# Altium PCB NEW_UI.PcbDoc (part 4 of 4)
Units mm, origin at the board's own origin, x right, y up, seen from the top; angles counter-clockwise.
Board outline 100 x 100 mm, 4 copper layers (SIG/PWR1, GND1, GNS2, SIG/PWR2), stack 1.17 mm thick; 240 components, 215 nets, 917 pads, 445 vias.
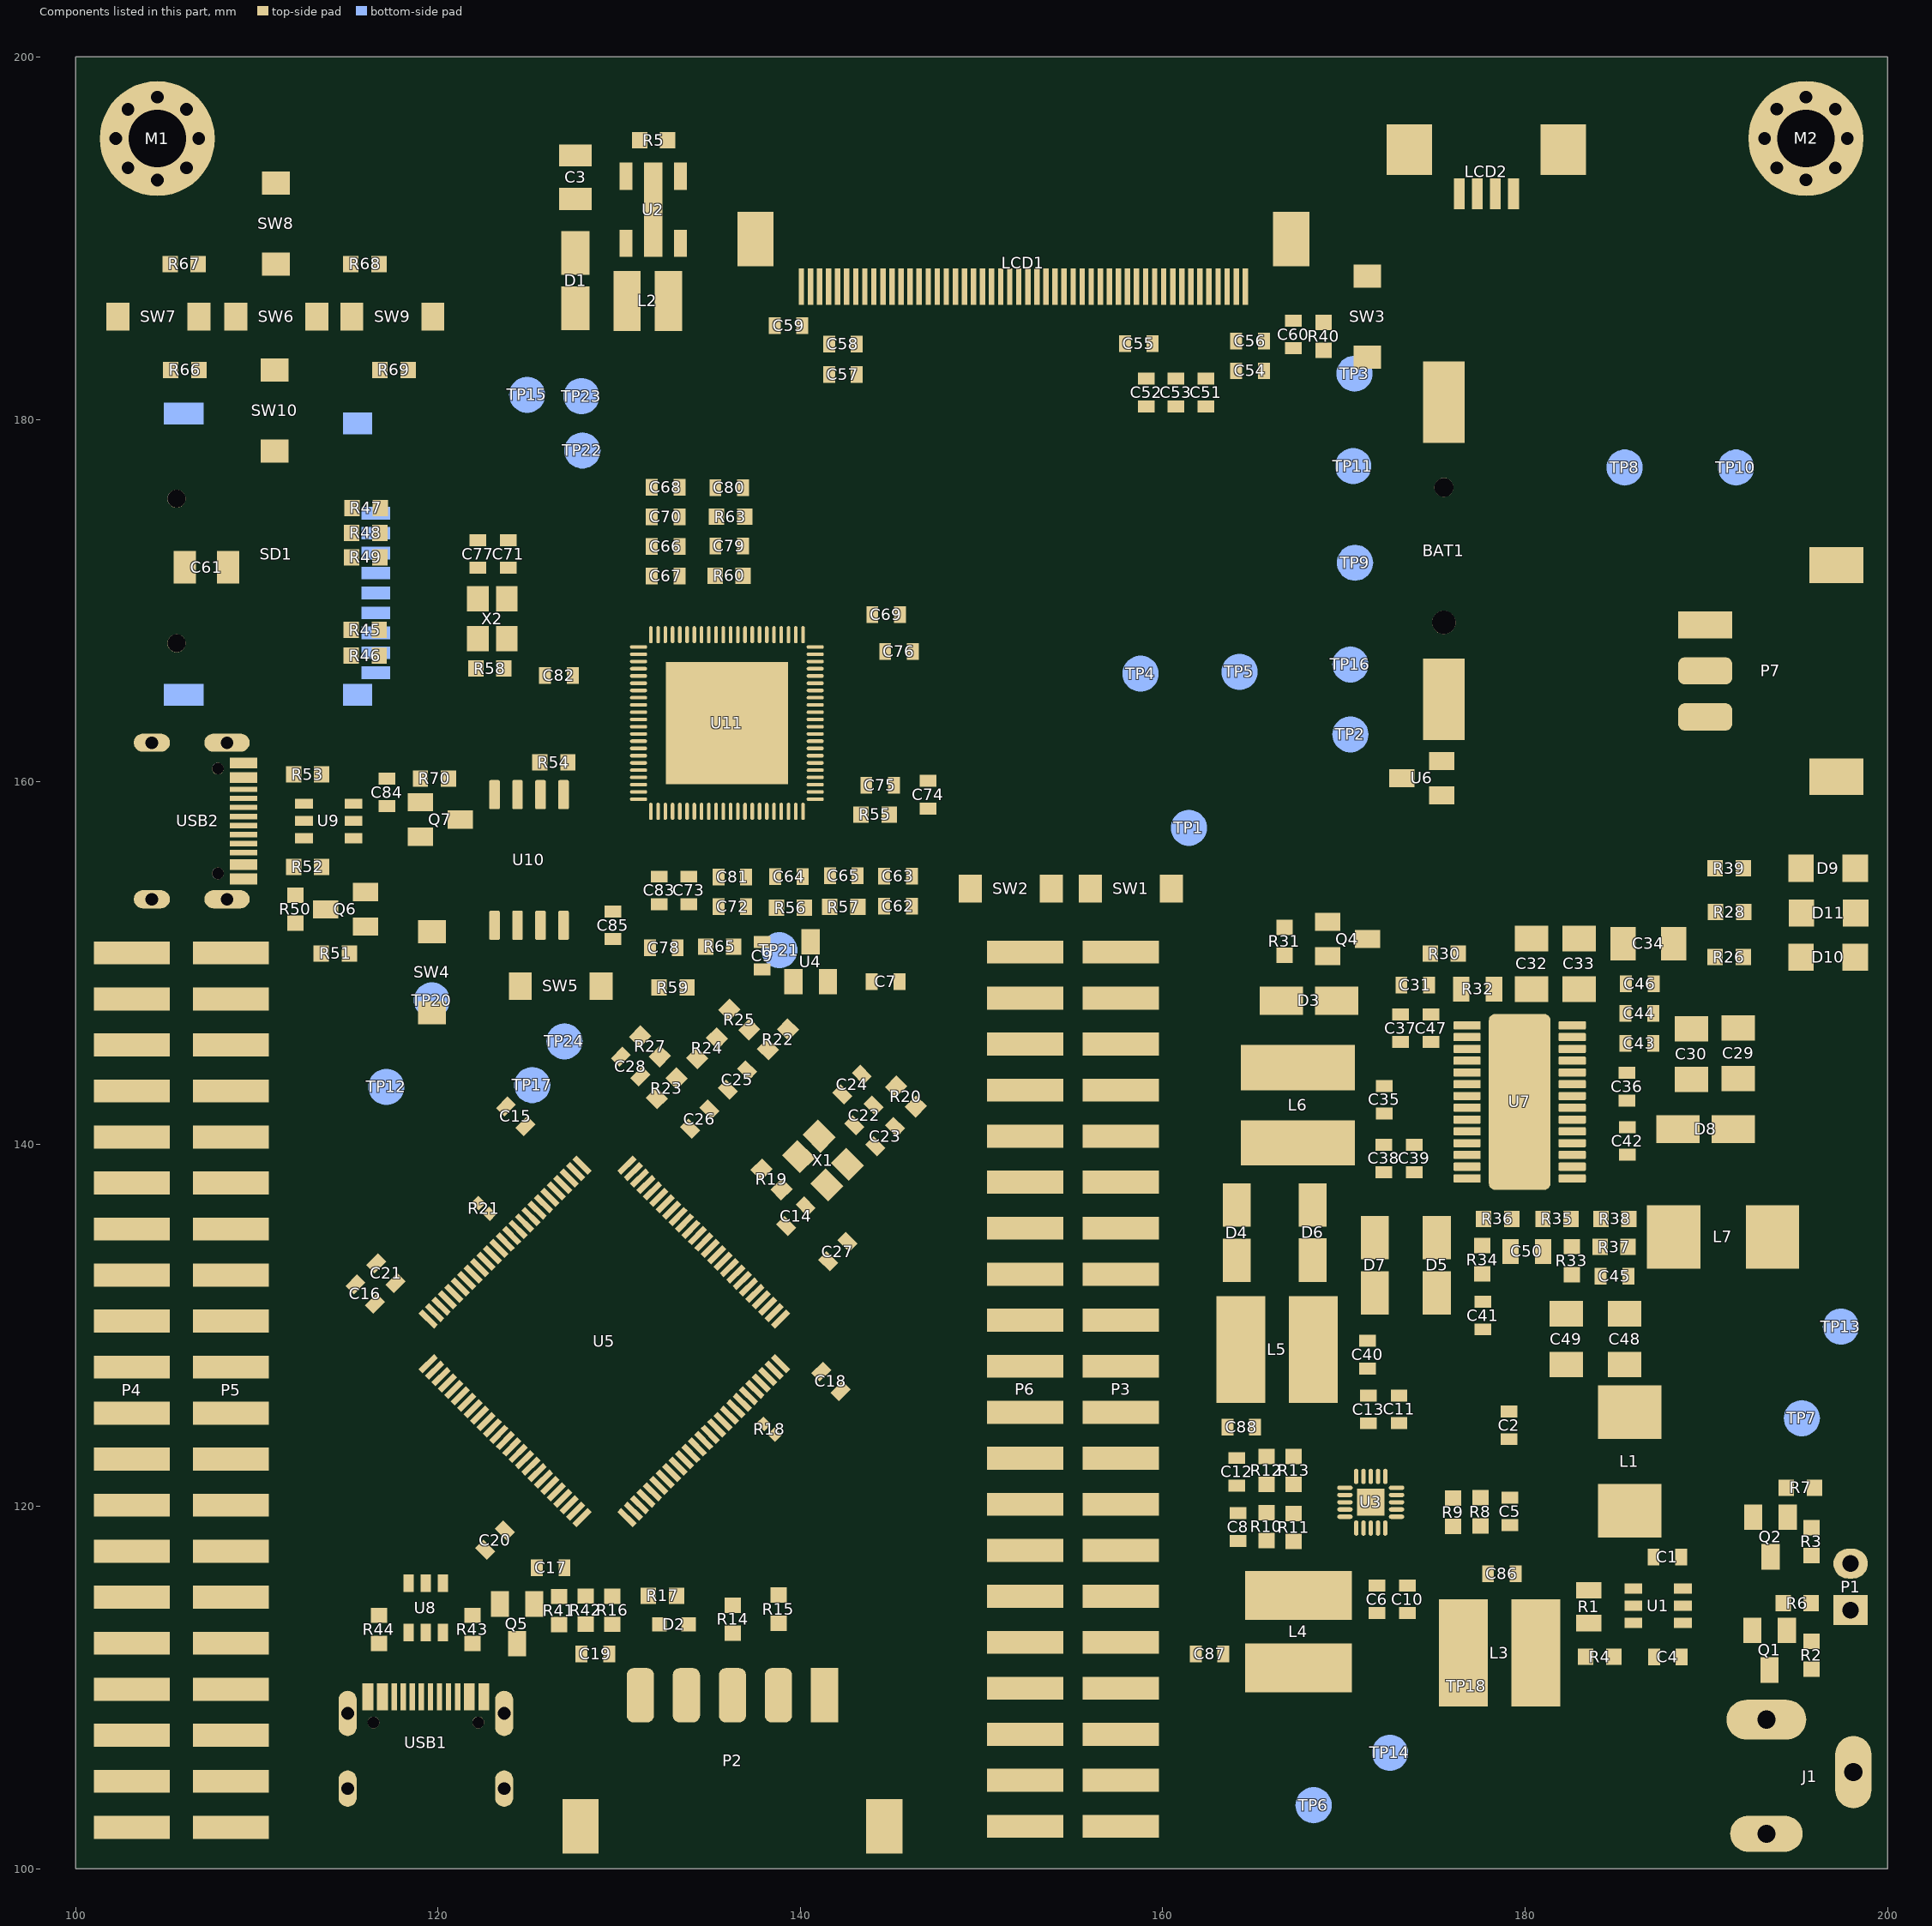
[diagram p6: the components of this part, seen from the top]

## Polygon pours and split planes (outlines as drawn) (continued)
3V3 on SIG/PWR2 "3V3_L04_P048" (solid, remove dead copper, pour order 48): 129.616,144.577 143.573,130.619 128.41,115.456 114.452,129.413
5V on SIG/PWR2 "5V_L04_P012" (solid, remove dead copper, pour order 12): 173.965,125.374 169.113,125.374 169.113,115.164 173.965,115.164
1.1V on SIG/PWR2 "1.1V_L04_P095" (solid, remove dead copper, pour order 95): 132.207,156.108 132.207,155.702 132.512,155.499 136.703,154 159.918,154 159.918,155.409 136.728,155.409 132.486,156.337
3V3 on SIG/PWR2 "3V3_L04_P107" (solid, remove dead copper, pour order 107): 152.476,158.852 148.488,158.852 147.65,159.69 134.925,159.69 134.925,164.338 138.43,164.338 138.43,163.881 140.691,163.881 143.104,161.468 152.476,161.468
5V on SIG/PWR2 "5V_L04_P123" (solid, pour order 123): 115.291,155.118 115.291,148.793 108.026,141.529 108.026,117.805 110.896,114.935 112.725,116.764 112.725,126.009 111.938,126.797 111.938,139.243 116.764,144.069 116.764,153.06 117.272,153.568 117.551,153.568 117.551,153.899 117.526,153.924 117.526,154.356 116.764,155.118
3V3 on SIG/PWR2 "3V3_L04_P111" (solid, remove dead copper, pour order 111): 124.333,160.299 124.333,158.953 130.251,153.035 130.251,149.784 132.664,147.371 132.664,144.602 132.131,144.602 125.324,151.409 125.324,155.397 120.599,160.122 120.599,161.392 123.241,161.392
3V3 on SIG/PWR2 "3V3_L04_P116" (solid, remove dead copper, pour order 116): 114.046,167.005 113.411,166.37 113.411,164.211 115.367,162.255 121.082,162.255 123.444,159.893 123.444,157.785 116.713,157.785 107.848,166.649 107.848,167.005
3V3 on SIG/PWR2 "3V3_L04_P118" (solid, pour order 118): 133.325,157.709 133.35,157.683 133.35,146.482 133.223,146.482 125.908,153.797 125.908,156.007 129.184,156.007 130.886,157.709 133.35,157.709
3V3 on SIG/PWR2 "3V3_L04_P106" (solid, remove dead copper, pour order 106): 143.866,167.31 143.002,167.31 141.453,165.76 134.976,165.76 134.976,163.957 141.3,163.957 143.866,166.522
5V on SIG/PWR2 "5V_L04_P065" (solid, remove dead copper, pour order 65): 113.106,104.369 110.896,104.369 110.896,114.935 112.725,116.764 124.054,116.764 124.054,115.113 124.079,115.087 118.085,115.087 114.173,115.087 113.106,114.021
NetJ1_3 on SIG/PWR2 "NETJ1_3_L04_P117" (solid, remove dead copper, pour order 117): 199.365,115.503 195.809,115.503 195.809,102.819 199.365,102.819
1.1V on SIG/PWR2 "1.1V_L04_P054" (solid, remove dead copper, pour order 54): 163.271,125.07 162.306,125.07 160.757,123.52 159.918,123.52 159.918,168.961 157.607,168.961 157.607,122.453 159.614,120.447 163.271,120.447
5V on SIG/PWR2 "5V_L04_P114" (solid, remove dead copper, pour order 114): 179.832,121.514 181.432,121.514 182.55,120.396 182.55,106.451 110.871,106.451 110.871,103.657 112.141,102.387 183.693,102.387 185.877,104.572 185.877,122.225 183.845,124.257 179.832,124.257
Vsupply on SIG/PWR2 "VSUPPLY_L04_P016" (solid, remove dead copper, pour order 16): 173.33,142.24 173.33,141.097 173.863,140.564 184.506,140.564 184.506,142.875 175.997,142.875 175.362,142.24
3V3 on SIG/PWR2 "3V3_L04_P109" (solid, remove dead copper, pour order 109): 133.845,156.693 130.759,156.693 130.454,156.693 130.124,157.023 130.124,157.328 130.378,157.582 130.378,162.636 127.025,162.636 125.73,165.176 126.314,165.278 127.883,163.982 133.845,163.982 133.845,159.106
3V3 on SIG/PWR2 "3V3_L04_P047" (solid, remove dead copper, pour order 47): 179.527,119.304 181.686,119.304 182.321,118.669 182.321,104.851 128.981,104.851 128.981,107.975 179.133,107.975 179.133,118.91
3V3 on SIG/PWR2 "3V3_L04_P029" (solid, remove dead copper, pour order 29): 104.47,176.555 115.976,176.555 115.976,166.446 104.47,166.446
3V3 on SIG/PWR2 "3V3_L04_P103" (solid, remove dead copper, pour order 103): 138.608,156.642 141.3,159.334 141.3,163.957 133.553,163.957 133.553,157.836 134.747,156.642
"3V3 LCD" on SIG/PWR2 "3V3_LCD_L04_P091" (solid, remove dead copper, pour order 91): 143.586,185.217 142.545,185.217 142.545,191.059 144.12,192.634 160.807,192.634 162.89,190.551 162.89,186.385 159.868,186.385 161.112,187.63 161.112,189.763 159.436,191.44 144.755,191.44 143.586,190.271
1.1V on SIG/PWR2 "1.1V_L04_P090" (solid, remove dead copper, pour order 90): 135.153,170.155 134.899,169.901 134.899,168.224 135.56,167.564 159.918,167.564 159.918,168.961 136.55,168.961 136.22,169.291 136.22,169.799 135.865,170.155
10.4V on SIG/PWR2 "10.4V_L04_P089" (solid, remove dead copper, pour order 89): 162.179,183.92 167.31,183.92 186.842,183.92 186.842,184.786 162.179,184.786
"3V3 LCD" on SIG/PWR2 "3V3_LCD_L04_P088" (solid, remove dead copper, pour order 88): 158.852,185.09 163.982,185.09 192.989,185.09 192.989,186.792 158.852,186.792
10.4V on SIG/PWR2 "10.4V_L04_P076" (solid, remove dead copper, pour order 76): 186.842,154.407 186.842,184.734 184.074,184.734 184.074,154.407
3V on SIG/PWR2 "3V_L04_P075" (solid, remove dead copper, pour order 75): 147.345,150.52 148.793,150.52 148.793,141.58 149.835,141.58 149.835,151.486 147.345,151.486
3V3 on SIG/PWR2 "3V3_L04_P074" (solid, remove dead copper, pour order 74): 132.029,142.164 132.029,148.006 133.756,148.006 133.756,147.091 134.645,146.202 137.871,146.202 141.63,149.962 143.18,149.962 143.18,146.812 135.28,138.913
2.5V on SIG/PWR2 "2.5V_L04_P072" (solid, remove dead copper, pour order 72): 134.01,170.358 134.01,173.05 135.484,174.523 165.608,174.523 165.608,172.39 138.278,172.39 137.236,171.348 137.236,170.155 136.5,170.155 135.814,170.84 135.28,170.84 134.798,170.358
2.5V on SIG/PWR2 "2.5V_L04_P071" (solid, remove dead copper, pour order 71): 161.163,119.99 162.814,119.99 162.814,173.076 165.608,173.076 165.608,117.221 161.163,117.221
3V3 on SIG/PWR2 "3V3_L04_P070" (solid, remove dead copper, pour order 70): 149.86,141.097 149.885,141.072 149.885,139.802 148.869,139.802 141.478,132.41 140.348,133.54 147.904,141.097
3V3 on SIG/PWR2 "3V3_L04_P067" (solid, remove dead copper, pour order 67): 128.41,115.456 128.981,114.884 128.981,106.248 132.232,106.248 132.232,119.583 128.41,115.76
9V on SIG/PWR2 "9V_L04_P063" (solid, remove dead copper, pour order 63): 110.414,102.921 113.436,102.921 113.436,100.635 110.414,101.702
NetQ5_3 on SIG/PWR2 "NETQ5_3_L04_P060" (solid, remove dead copper, pour order 60): 115.672,112.598 114.478,111.404 114.478,110.566 123.546,110.566 124.409,109.703 124.409,107.975 125.857,107.975 125.857,112.014 125.857,112.598
5V on SIG/PWR2 "5V_L04_P053" (solid, remove dead copper, pour order 53): 179.832,121.514 173.177,121.514 173.177,124.257 179.832,124.257
"3V3 LCD" on SIG/PWR2 "3V3_LCD_L04_P052" (solid, remove dead copper, pour order 52): 178.511,129.515 178.511,127 189.636,127 192.989,130.353 192.989,185.826 190.297,185.826 190.297,132.232 187.579,129.515
9V on SIG/PWR2 "9V_L04_P051" (solid, remove dead copper, pour order 51): 194.361,109.83 194.386,109.804 194.386,106.426 192.913,106.426 187.122,100.635 113.436,100.635 113.436,102.133 183.769,102.133 191.465,109.83
GND on SIG/PWR1 "GND_L01_P122" (solid, remove dead copper, pour order 122): 100,200 100,100 200,100 200,200
3V3 on SIG/PWR1 "3V3_L01_P100" (solid, remove dead copper, pour order 100): 136.017,157.632 136.017,157.15 134.518,155.651 134.518,154.483 133.375,154.483 133.375,155.448 134.417,156.489 134.417,157.632
5V on SIG/PWR1 "5V_L01_P009" (solid, remove dead copper, pour order 9): 172.669,121.234 170.942,121.234 170.942,125.4 173.939,125.4 173.939,124.262 173.938,124.26 173.941,124.257 180.238,124.257 180.238,121.514 172.949,121.514
VREF- on SIG/PWR1 "NONET_L04_P-001" (solid, pour order 27): 136.561,147.919 138.227,146.228 136.271,144.272 136.271,143.851 137.038,143.084 135.064,141.11 133.96,142.215 133.96,142.494 135.153,143.688 135.153,145.096 134.445,145.804
2.5V on SIG/PWR1 "2.5V_L01_P119" (solid, remove dead copper, pour order 119): 137.439,167.259 136.449,167.259 136.449,169.164 136.703,170.231 137.287,170.231 137.439,169.189
GND on SIG/PWR1 "GND_L01_P121" (solid, remove dead copper, pour order 121): 131.826,167.361 140.081,167.361 140.081,159.106 131.826,159.106
3V3 on SIG/PWR1 "3V3_L01_P115" (solid, remove dead copper, pour order 115): 155.575,143.612 159.791,143.612 159.791,139.802 155.575,139.802
3V3 on SIG/PWR1 "3V3_L01_P112" (solid, remove dead copper, pour order 112): 130.357,150.292 128.6,150.292 125.07,150.292 125.07,152.874 125.309,153.113 128.045,153.113 128.922,152.236 128.934,152.248 130.357,152.248
NetJ1_3 on SIG/PWR1 "NETJ1_3_L01_P026" (solid, remove dead copper, pour order 26): 199.365,115.503 195.809,115.503 195.809,102.819 199.365,102.819
Vsupply on SIG/PWR1 "VSUPPLY_L01_P005" (solid, remove dead copper, pour order 5): 181.788,142.977 186.182,142.977 188.011,144.805 198.577,144.805 198.577,121.92 192.761,121.92 192.761,120.548 192.761,118.491 192.761,112.039 190.678,112.039 190.678,111.76 189.408,110.49 188.062,110.49 187.731,110.82 187.731,115.011 189.687,115.011 189.89,115.214 189.89,126.34 196.164,132.613 196.164,139.573 193.675,142.062 184.506,142.062 184.506,140.691 181.813,140.691
5V on SIG/PWR1 "5V_L01_P110" (solid, remove dead copper, pour order 110): 117.831,154.457 117.831,153.238 115.164,153.238 115.164,155.296 115.316,155.448 116.84,155.448 116.942,155.346
NetL5_2 on SIG/PWR1 "NETL5_2_L01_P011" (solid, remove dead copper, pour order 11): 166.929,131.623 169.697,131.623 169.697,122.675 170.275,122.098 170.681,122.098 170.681,121.234 170.199,121.234 168.493,122.94 166.929,124.366
"3V3 LCD" on SIG/PWR1 "3V3_LCD_L01_P041" (solid, remove dead copper, pour order 41): 178.511,129.515 187.579,129.515 192.049,133.985 192.049,136.855 195.428,136.855 195.428,132.791 189.636,127 178.511,127
NetQ6_3 on SIG/PWR1 "NETQ6_3_L01_P108" (solid, remove dead copper, pour order 108): 114.554,154.178 114.554,151.841 106.07,151.841 106.07,163.11 112.376,163.11 112.376,159.072 106.965,159.072 106.965,156.557 112.598,156.557 112.598,154.178
3V3 on SIG/PWR1 "3V3_L01_P105" (solid, remove dead copper, pour order 105): 104.47,177.013 115.976,177.013 115.976,165.583 104.47,165.583
3V3 on SIG/PWR1 "3V3_L01_P104" (solid, remove dead copper, pour order 104): 145.034,167.64 143.358,167.64 142.443,166.726 142.443,166.522 145.034,166.522
1.1V on SIG/PWR1 "1.1V_L01_P101" (solid, remove dead copper, pour order 101): 144.323,169.672 144.323,168.732 143.383,168.732 142.037,167.386 140.538,167.386 140.538,167.894 141.351,168.707 142.443,168.707 143.44,169.704
1.1V on SIG/PWR1 "1.1V_L01_P099" (solid, remove dead copper, pour order 99): 133.325,157.328 133.477,157.328 133.477,156.032 132.69,155.245 132.69,154.407 131.724,154.407 131.724,155.727
3V3 on SIG/PWR1 "3V3_L01_P098" (solid, remove dead copper, pour order 98): 128.651,165.481 126.492,167.64 124.638,167.64 124.638,165.329 128.651,165.329
3V3 on SIG/PWR1 "3V3_L01_P096" (solid, remove dead copper, pour order 96): 148.488,158.852 147.65,159.69 146.99,159.69 146.99,160.35 148.717,160.35 152.375,160.35 152.375,158.852
NetD1_2 on SIG/PWR1 "NETD1_2_L01_P093" (solid, remove dead copper, pour order 93): 130.023,190.475 130.734,190.475 130.734,188.646 131.191,188.189 131.191,184.887 126.797,184.887 126.797,187.35 128.422,187.35 130.023,188.951
10.4V on SIG/PWR1 "10.4V_L01_P092" (solid, remove dead copper, pour order 92): 184.074,182.042 184.074,196.494 183.591,196.977 132.41,196.977 131.75,196.317 131.75,191.389 128.245,187.884 125.247,187.884 125.247,197.51 126.822,199.085 184.81,199.085 186.842,197.053 186.842,182.042
GND on SIG/PWR1 "GND_L01_P084" (solid, remove dead copper, pour order 84): 126.594,193.878 126.594,196.723 128.676,196.723 128.676,193.878
"3V3 LCD" on SIG/PWR1 "3V3_LCD_L01_P081" (solid, remove dead copper, pour order 81): 143.586,188.341 142.553,188.341 142.553,181.966 143.586,181.966
GND on SIG/PWR1 "GND_L01_P080" (solid, remove dead copper, pour order 80): 107.02,160.783 107.02,162.231 109.56,162.231 109.56,160.809
GND on SIG/PWR1 "GND_L01_P077" (solid, remove dead copper, pour order 77): 109.677,154.876 109.677,153.429 107.137,153.429 107.137,154.851
10.4V on SIG/PWR1 "10.4V_L01_P073" (solid, remove dead copper, pour order 73): 186.614,153.264 186.614,156.489 184.201,156.489 184.201,153.264
3V3 on SIG/PWR1 "3V3_L01_P069" (solid, remove dead copper, pour order 69): 144.297,147.955 140.919,147.955 140.919,149.835 141.046,149.962 144.297,149.962
1.1V on SIG/PWR1 "1.1V_L01_P044" (solid, remove dead copper, pour order 44): 165.71,131.648 162.966,131.648 162.966,125.806 161.29,124.079 161.29,120.447 163.271,120.447 163.271,122.606 165.887,122.606 165.887,131.47
3V on SIG/PWR1 "3V_L01_P068" (solid, remove dead copper, pour order 68): 141.173,151.968 141.656,151.486 149.352,151.486 149.352,150.52 139.954,150.52 139.954,151.968
3V3 on SIG/PWR1 "3V3_L01_P066" (solid, remove dead copper, pour order 66): 147.345,139.802 147.345,141.097 159.791,141.097 159.791,139.802
3V3 on SIG/PWR1 "3V3_L01_P064" (solid, remove dead copper, pour order 64): 131.445,112.166 131.953,112.166 131.953,108.077 129.083,108.077 129.083,112.547 131.064,112.547
5V on SIG/PWR1 "5V_L01_P061" (solid, remove dead copper, pour order 61): 112.954,105.486 112.954,104.165 106.477,104.165 106.477,105.486
5V on SIG/PWR1 "5V_L01_P062" (solid, remove dead copper, pour order 62): 121.209,116.332 123.927,116.332 123.977,116.281 123.977,113.894 122.834,113.894 122.834,114.605 121.285,114.605 121.209,114.681
9V on SIG/PWR1 "9V_L01_P059" (solid, remove dead copper, pour order 59): 113.182,102.946 113.182,101.625 106.477,101.625 106.477,102.946
GND on SIG/PWR1 "GND_L01_P056" (solid, remove dead copper, pour order 56): 123.667,109.83 122.219,109.83 122.219,107.29 123.642,107.29
GND on SIG/PWR1 "GND_L01_P045" (solid, remove dead copper, pour order 45): 114.986,109.83 116.434,109.83 116.434,107.29 115.011,107.29
NetQ5_3 on SIG/PWR1 "NETQ5_3_L01_P058" (solid, remove dead copper, pour order 58): 127.381,113.665 127.381,112.7 125.857,111.176 125.857,106.604 114.046,106.604 114.046,112.598 118.085,112.598 118.085,107.188 120.599,107.188 120.599,110.033 124.231,113.665
10.4V on SIG/PWR1 "10.4V_L01_P023" (solid, remove dead copper, pour order 23): 170.078,150.216 172.466,150.216 172.466,151.206 172.618,151.359 178.892,151.359 178.892,149.631 187.147,149.631 187.147,153.264 170.078,153.264
5V on SIG/PWR1 "5V_L01_P010" (solid, remove dead copper, pour order 10): 171.069,125.4 170.129,125.4 170.129,122.631 171.069,122.631
2.5V on SIG/PWR1 "2.5V_L01_P042" (solid, remove dead copper, pour order 42): 161.163,119.99 161.163,115.626 162.611,111.76 162.611,109.753 162.839,109.525 170.739,109.525 170.739,112.573 170.256,113.055 163.906,113.055 163.906,119.99
NetL3_2 on SIG/PWR1 "NETL3_2_L01_P014" (solid, remove dead copper, pour order 14): 172.644,119.482 174.092,119.482 177.317,116.256 178.638,116.256 178.638,108.966 174.828,108.966 174.828,116.662 172.644,118.847
3V3 on SIG/PWR1 "3V3_L01_P015" (solid, remove dead copper, pour order 15): 177.241,119.786 179.959,119.786 180.442,119.304 181.585,119.304 182.143,118.745 182.143,108.941 178.968,108.941 178.968,118.059 177.241,118.059
5V on SIG/PWR1 "5V_L01_P040" (solid, remove dead copper, pour order 40): 182.702,126.721 184.048,126.721 187.554,126.721 187.554,123.723 187.528,123.698 182.423,123.698 180.238,121.514 180.238,124.257
3V3 on SIG/PWR1 "3V3_L01_P035" (solid, remove dead copper, pour order 35): 126.594,138.557 126.365,138.786 126.162,138.786 124.155,140.792 124.155,141.097 124.816,141.757 124.866,141.757 126.746,139.878 126.746,138.709
3V3 on SIG/PWR1 "3V3_L01_P037" (solid, remove dead copper, pour order 37): 116.662,131.851 117.577,130.937 118.872,130.937 119.621,130.188 118.872,129.565 116.92,130.179 115.847,131.066
VLED- on SIG/PWR1 "VLED-_L01_P039" (solid, remove dead copper, pour order 39): 134.315,188.265 134.315,187.731 137.744,184.302 139.116,184.302 139.649,184.836 139.649,185.623 140.538,185.623 140.538,183.388 133.274,183.388 131.674,184.988 131.674,188.265
VLED+ on SIG/PWR1 "VLED+_L01_P038" (solid, remove dead copper, pour order 38): 132.105,195.986 132.105,194.539 132.512,194.539 132.867,194.183 132.867,192.557 137.947,192.557 139.802,190.703 139.802,188.697 140.818,188.697 140.818,193.167 137.998,195.986
NetC21_1 on SIG/PWR1 "NETC21_1_L01_P036" (solid, remove dead copper, pour order 36): 116.967,132.207 117.704,131.47 118.847,131.47 119.113,131.204 119.304,131.394 119.304,131.699 117.881,133.121
3V3 on SIG/PWR1 "3V3_L01_P034" (solid, remove dead copper, pour order 34): 135.941,134.112 136.525,134.112 137.185,134.772 137.071,134.658 139.421,134.772 140.03,135.382 139.116,136.296 137.566,136.296 135.661,134.391
3V3 on SIG/PWR1 "3V3_L01_P033" (solid, remove dead copper, pour order 33): 138.328,128.143 139.217,127.254 139.725,127.762 140.741,126.746 141.173,126.746 142.113,127.686 142.113,129.108 141.859,129.362 139.04,129.362 138.328,128.651
VBATRTC on SIG/PWR1 "VBATRTC_L01_P032" (solid, remove dead copper, pour order 32): 142.291,133.452 141.389,134.353 140.513,133.477 138.201,133.477 137.439,132.715 137.566,132.588 141.427,132.588
3V3 on SIG/PWR1 "3V3_L01_P031" (solid, remove dead copper, pour order 31): 127.947,119.385 126.543,117.981 126.543,115.799 128.753,115.799 128.88,115.672 128.88,114.376 128.956,114.3 130.251,114.3 130.251,115.697 128.422,117.526 128.422,118.91
NetC20_1 on SIG/PWR1 "NETC20_1_L01_P030" (solid, remove dead copper, pour order 30): 126.543,119.558 126.779,119.321 123.668,117.937 122.809,118.796 123.571,119.558
GND on SIG/PWR1 "GND_L01_P028" (solid, remove dead copper, pour order 28): 107.721,172.822 110.566,172.822 110.566,170.739 107.721,170.739
VBAT on SIG/PWR1 "VBAT_L01_P004" (solid, remove dead copper, pour order 4): 192.837,118.135 199.238,118.135 199.238,117.958 199.238,115.672 195.377,115.672 194.767,116.281 194.742,116.256 192.862,116.256
NetD3_2 on SIG/PWR1 "NETD3_2_L01_P018" (solid, remove dead copper, pour order 18): 167.843,148.768 167.843,145.948 168.478,145.313 172.161,145.313 172.669,144.805 172.745,144.882 177.597,144.882 177.597,143.688 171.729,143.688 170.917,142.875 164.186,142.875 164.186,147.625 165.329,148.768
Vsupply on SIG/PWR1 "VSUPPLY_L01_P017" (solid, remove dead copper, pour order 17): 164.236,138.684 170.637,138.684 171.069,139.116 171.069,140.614 171.653,141.199 177.546,141.199 177.546,142.367 171.196,142.367 170.18,141.351 164.236,141.351
5V on SIG/PWR1 "5V_L01_P008" (solid, remove dead copper, pour order 8): 170.942,119.228 171.018,119.228 172.415,119.228 172.415,118.618 174.549,116.484 174.549,114.783 170.84,114.783 170.84,118.135 170.942,118.237
NetL4_2 on SIG/PWR1 "NETL4_2_L01_P013" (solid, remove dead copper, pour order 13): 164.49,113.614 170.485,113.614 170.485,118.186 170.681,118.382 170.681,119.228 170.218,119.228 168.961,117.97 167.331,116.484 164.49,116.484
NetC1_1 on SIG/PWR1 "NETC1_1_L01_P007" (solid, remove dead copper, pour order 7): 189.509,121.234 183.998,121.234 183.998,118.237 187.966,118.237 187.966,115.466 189.509,115.466
NetC42_1 on SIG/PWR1 "NETC42_1_L01_P006" (solid, remove dead copper, pour order 6): 181.762,140.386 184.683,140.386 184.76,140.462 184.76,141.783 189.713,141.783 189.713,133.147 186.766,133.147 186.766,139.725 181.762,139.725
9V on SIG/PWR1 "9V_L01_P002" (solid, remove dead copper, pour order 2): 196.799,111.76 196.698,111.862 191.084,111.862 190.475,111.252 190.475,106.832 190.957,106.35 195.859,106.35 196.799,107.29
NetC81_2 on SIG/PWR1 "NETC81_2_L01_P001" (solid, pour order 1): 108.966,181.813 105.791,184.988 105.791,186.411 108.788,189.408 113.182,189.408 116.205,186.385 116.205,185.014 113.005,181.813 111.658,181.813
GND on GNS2 (split plane): 199.495,100.513 100.516,100.513 100.516,199.492 199.495,199.492
GND on GND1 (split plane): 199.495,100.513 100.516,100.513 100.516,199.492 199.495,199.492

## Other copper
SIG/PWR2:
  pour cut-out: 162.535,154.915 162.535,153.441 160.198,153.441 160.198,154.915
  pour cut-out: 181.271,141.554 178.131,141.554 177.14,140.564 182.261,140.564
  pour cut-out: 123.228,120.599 123.063,120.599 123.063,121.628 123.228,121.628
  pour cut-out: 123.977,121.793 123.977,121.628 123.063,121.628 123.063,121.793
  pour cut-out: 132.029,143.637 132.029,142.164 127.203,142.164 127.203,143.637

## Silkscreen, mask and mechanical layers (free items; w line width, h text height)
Top Overlay:
  circle w0.512: c117.526,193.497 r0.75
  lines w0.254: 101.321,165.379 101.321,163.83 104.546,163.83 ; 101.321,177.571 101.321,180.924 104.318,180.924 ; 107.569,163.83 117.069,163.83 117.069,165.379 ; 107.798,180.924 117.069,180.924 117.069,176.098
  lines w0.512: 115.04,192.942 114.452,193.497 ; 115.054,194.066 114.452,193.497 ; 115.976,193.497 114.452,193.497 ; 116.957,191.026 117.526,190.424 ; 116.971,195.983 117.526,196.571 ; 117.526,191.948 117.526,190.424 ; 117.526,195.047 117.526,196.571 ; 118.081,191.012 117.526,190.424 ; 118.081,195.983 117.526,196.571 ; 119.075,193.497 120.599,193.497 ; 119.997,192.929 120.599,193.497 ; 120.011,194.052 120.599,193.497
  text "Used for bootload" at 100.699,169.214 h1.02
  text "SRST" at 156.515,156.312 h1
  text "WkUP" at 146.863,156.21 h1
  text "FEL" at 114.884,147.345 h1
  text "FRST" at 124.968,145.567 h1
  text "+" at 197.587,118.756 h1
Bottom Overlay:
  drawing of 78 lines, arcs and shapes, not listed
  text "LRST" at 172.364,184.734 h1
  text "GND" at 126.213,183.464 h1
  text "TX" at 132.105,180.975 h1
  text "5V" at 171.298,179.476 h1
  text "10V4" at 187.147,179.451 h1
  text "3V3 LCD" at 194.92,179.426 h1
  text "RX" at 131.978,177.851 h1
  text "Bui Hoang" at 156.816,174.737 h2
  text "16V" at 171.755,174.219 h1
  text "C25" at 156.841,170.794 h2
  text "GND" at 171.679,168.681 h1
  text "2V5" at 165.506,168.377 h1
  text "1V1" at 159.893,168.326 h1
  text "Audio port" at 195.309,161.975 h1.02 r270
  text "SRST" at 163.347,159.537 h1
  text "VBAT" at 172.187,158.318 h1
  text "USB-C for F1C" at 105.74,152.146 h1.02 r270
  text "PA0" at 153.653,150.122 h1
  text "PC3" at 159.029,150.114 h1
  text "PA1" at 104.282,150.059 h1
  text "PA2" at 109.906,150.063 h1
  text "PC2" at 153.619,147.549 h1
  text "PC1" at 158.902,147.549 h1
  text "PA3" at 104.343,147.498 h1
  text "PA4" at 109.779,147.498 h1
  text "FEL" at 117.551,147.345 h1
  text "BTNARR" at 147.142,146.66 h1
  text "FRST" at 124.968,145.618 h1
  text "GND" at 118.466,145.186 h1
  text "PC0" at 153.695,145.009 h1
  text "RST" at 158.928,145.009 h1
  text "PA5" at 104.419,144.958 h1
  text "PA6" at 109.804,144.958 h1
  text "SRST" at 123.19,143.815 h1
  text "3V" at 153.145,142.469 h1
  text "3V3" at 159.004,142.469 h1
  text "PA7" at 104.369,142.418 h1
  text "PC4" at 109.88,142.418 h1
  text "3V3" at 153.695,139.929 h1
  text "3V3" at 158.979,139.929 h1
  text "PC5" at 104.419,139.878 h1
  text "PB0" at 109.855,139.878 h1
  text "GND" at 153.633,137.389 h1
  text "GND" at 159.029,137.389 h1
  text "PB1" at 104.191,137.338 h1
  text "PB7" at 109.906,137.338 h1
  text "PC14" at 154.137,134.874 h1
  text "PC15" at 159.446,134.874 h1
  text "PE8" at 104.445,134.823 h1
  text "PE9" at 109.906,134.823 h1
  text "PE6" at 153.721,132.334 h1
  text "PC13" at 159.446,132.334 h1
  text "PE10" at 104.861,132.283 h1
  text "PE11" at 110.156,132.283 h1
  text "GND" at 198.78,132.029 h1
  text "PE4" at 153.721,129.794 h1
  text "PE5" at 159.029,129.794 h1
  text "PE12" at 104.861,129.743 h1
  text "PE13" at 110.322,129.743 h1
  text "PE2" at 153.708,127.254 h1
  text "PE3" at 159.029,127.254 h1
  text "PE14" at 104.848,127.203 h1
  text "PE15" at 110.322,127.203 h1
  text "VSUPPLY" at 198.552,126.797 h1
  text "PE0" at 153.721,124.714 h1
  text "PE1" at 158.863,124.714 h1
  text "PB11" at 104.695,124.663 h1
  text "PB10" at 110.322,124.663 h1
  text "PB8" at 153.721,122.174 h1
  text "PB9" at 159.029,122.174 h1
  text "PE12" at 104.861,122.123 h1
  text "PB13" at 110.322,122.123 h1
  text "PB6" at 153.721,119.634 h1
  text "PB7" at 159.029,119.634 h1
  text "PB14" at 104.861,119.583 h1
  text "PB15" at 110.322,119.583 h1
  text "PB4" at 153.721,117.094 h1
  text "PB5" at 159.029,117.094 h1
  text "PD8" at 104.445,117.043 h1
  text "PD9" at 109.906,117.043 h1
  text "V1.1" at 148.657,116.392 h3
  text "PD6" at 153.721,114.554 h1
  text "PD7" at 159.029,114.554 h1
  text "PD10" at 104.861,114.503 h1
  text "PD11" at 110.156,114.503 h1
  text "GND" at 178.079,112.116 h1
  text "PD4" at 153.721,112.014 h1
  text "PD5" at 159.029,112.014 h1
  text "PD12" at 104.861,111.963 h1
  text "PD13" at 110.322,111.963 h1
  text "9V-1A" at 195.557,110.262 h1
  text "PD2" at 153.721,109.474 h1
  text "PD3" at 159.029,109.474 h1
  text "PD15" at 104.861,109.423 h1
  text "PD14" at 110.322,109.423 h1
  text "3V3" at 173.812,108.433 h1
  text "PD0" at 153.721,106.934 h1
  text "PD1" at 158.863,106.934 h1
  text "PC7" at 104.445,106.883 h1
  text "PC6" at 109.906,106.883 h1
  text "SWD port" at 140.031,106.053 h1.02
  text "5V" at 169.113,105.562 h1
  text "PC11" at 153.971,104.394 h1
  text "PC12" at 159.446,104.394 h1
  text "PC8" at 104.445,104.343 h1
  text "5V" at 109.406,104.343 h1
  text "STM_USB" at 122.657,103.996 h1.02
  text "PA15" at 154.137,101.854 h1
  text "PC10" at 159.446,101.854 h1
  text "PC9" at 104.445,101.803 h1
  text "9V" at 109.406,101.803 h1
Drill Drawing:
  circle w0.254: c-22.87,75.37 r0.847
  circle w0.254: c-22.87,41.08 r0.508
  circle w0.254: c-22.87,41.08 r0.847
  lines w0.254: -23.717,36.847 -23.294,36.847 -22.87,36.424 -22.447,36.847 -22.024,36.847 -22.447,37.27 -22.024,37.694 -22.447,37.694 -22.87,38.117 -23.294,37.694 -23.717,37.694 -23.294,37.27 -23.717,36.847 ; -23.717,44.044 -23.717,44.467 -23.294,44.89 -23.717,45.314 -23.717,45.737 -23.294,45.737 -22.87,45.314 -22.447,45.737 -22.024,45.737 -22.024,45.314 -22.447,44.89 -22.024,44.467 -22.024,44.044 -22.447,44.044 -22.87,44.467 -23.294,44.044 -23.717,44.044 ; -23.717,48.7 -22.87,47.854 -22.024,48.7 -22.87,49.547 -23.717,48.7 ; -23.717,52.087 -23.294,52.087 -23.294,51.664 -22.447,51.664 -22.447,52.087 -22.024,52.087 -22.024,52.934 -22.447,52.934 -22.447,53.357 -23.294,53.357 -23.294,52.934 -23.717,52.934 -23.717,52.087 ; -23.717,57.167 -22.024,57.167 -22.87,55.474 -23.717,57.167 ; -23.717,59.707 -23.294,59.707 -22.87,59.284 -22.447,59.707 -22.024,59.707 -22.447,60.13 -22.024,60.554 -22.447,60.554 -22.87,60.977 -23.294,60.554 -23.717,60.554 -23.294,60.13 -23.717,59.707 ; -23.717,63.094 -22.024,63.094 -22.024,64.787 -23.717,64.787 -23.717,63.094 ; -23.717,66.904 -22.87,67.327 -22.024,66.904 -22.447,67.75 -22.024,68.597 -22.87,68.174 -23.717,68.597 -23.294,67.75 -23.717,66.904 ; -23.717,70.714 -22.024,70.714 -22.024,72.407 -23.717,72.407 -23.717,70.714 ; -23.717,80.027 -22.024,80.027 -22.87,78.334 -23.717,80.027 ; -23.378,37.016 -23.124,37.016 -22.87,36.762 -22.616,37.016 -22.362,37.016 -22.616,37.27 -22.362,37.524 -22.616,37.524 -22.87,37.778 -23.124,37.524 -23.378,37.524 -23.124,37.27 -23.378,37.016 ; -23.378,56.828 -22.362,56.828 -22.87,55.812 -23.378,56.828 ; -23.378,63.432 -22.362,63.432 -22.362,64.448 -23.378,64.448 -23.378,63.432
  lines w0.381: -25.236,35.281 332.6,35.281 ; -25.236,81.001 332.6,81.001 ; -11.243,31.471 -11.243,84.811 ; 3.993,31.471 3.993,84.811 ; 33.448,31.471 33.448,84.811 ; 46.297,31.471 46.297,84.811 ; 64.936,31.471 64.936,84.811 ; 95.407,31.471 95.407,84.811 ; 110.389,31.471 110.389,84.811 ; 129.332,31.471 129.332,84.811 ; 177.831,31.471 177.831,84.811 ; 199.517,31.471 199.517,84.811 ; 233.391,31.471 233.391,84.811 ; 267.264,31.471 267.264,84.811 ; 296.974,31.471 296.974,84.811 ; -25.236,31.471 332.6,31.471 332.6,84.811 -25.236,84.811 -25.236,31.471
  text "Symbol" at -22.95,82.144 h1.83
  text "Count" at -10.1,82.144 h1.83
  text "Hole Size" at 5.136,82.144 h1.83
  text "Plated" at 34.591,82.144 h1.83
  text "Hole Type" at 47.44,82.144 h1.83
  text "Drill Layer Pair" at 66.079,82.144 h1.83
  text "Via/Pad" at 96.55,82.144 h1.83
  text "Pad Shape" at 111.532,82.144 h1.83
  text "Template" at 130.475,82.144 h1.83
  text "Description" at 178.974,82.144 h1.83
  text "Hole Tolerance (+)" at 200.66,82.144 h1.83
  text "Hole Tolerance (-)" at 234.534,82.144 h1.83
  text "Hole Length" at 268.407,82.144 h1.83
  text "Routed Path Length" at 298.117,82.144 h1.83
  text "1" at -10.1,78.334 h1.52
  text "39,37mil (1,000mm)" at 5.136,78.334 h1.52
  text "PTH" at 34.591,78.334 h1.52
  text "Slot" at 47.44,78.334 h1.52
  text "SIG/PWR1 - SIG/PWR2" at 66.079,78.334 h1.52
  text "Pad" at 96.55,78.334 h1.52
  text "Rounded" at 111.532,78.334 h1.52
  text "r440_220h100_360r100_2670034071" at 130.475,78.334 h1.52
  text "141,73mil (3,600mm)" at 268.407,78.334 h1.52
  text "102,36mil (2,600mm)" at 298.117,78.334 h1.52
  text "1" at -10.1,74.524 h1.52
  text "41,34mil (1,050mm)" at 5.136,74.524 h1.52
  text "NPTH" at 34.591,74.524 h1.52
  text "Round" at 47.44,74.524 h1.52
  text "SIG/PWR1 - SIG/PWR2" at 66.079,74.524 h1.52
  text "Pad" at 96.55,74.524 h1.52
  text "Rounded" at 111.532,74.524 h1.52
  text "c105hn105" at 130.475,74.524 h1.52
  text "-" at 268.407,74.524 h1.52
  text "-" at 298.117,74.524 h1.52
  text "1" at -10.1,70.714 h1.52
  text "51,18mil (1,300mm)" at 5.136,70.714 h1.52
  text "NPTH" at 34.591,70.714 h1.52
  text "Round" at 47.44,70.714 h1.52
  text "SIG/PWR1 - SIG/PWR2" at 66.079,70.714 h1.52
  text "Pad" at 96.55,70.714 h1.52
  text "Rounded" at 111.532,70.714 h1.52
  text "c130hn130" at 130.475,70.714 h1.52
  text "-" at 268.407,70.714 h1.52
  text "-" at 298.117,70.714 h1.52
  text "2" at -10.1,66.904 h1.52
  text "36,00mil (0,914mm)" at 5.136,66.904 h1.52
  text "PTH" at 34.591,66.904 h1.52
  text "Round" at 47.44,66.904 h1.52
  text "SIG/PWR1 - SIG/PWR2" at 66.079,66.904 h1.52
  text "Pad" at 96.55,66.904 h1.52
  text "(Mixed)" at 111.532,66.904 h1.52
  text "(Mixed)" at 130.475,66.904 h1.52
  text "-" at 268.407,66.904 h1.52
  text "-" at 298.117,66.904 h1.52
  text "2" at -10.1,63.094 h1.52
  text "39,37mil (1,000mm)" at 5.136,63.094 h1.52
  text "PTH" at 34.591,63.094 h1.52
  text "Round" at 47.44,63.094 h1.52
  text "SIG/PWR1 - SIG/PWR2" at 66.079,63.094 h1.52
  text "Pad" at 96.55,63.094 h1.52
  text "Rounded" at 111.532,63.094 h1.52
  text "c100h100_2670034071" at 130.475,63.094 h1.52
  text "-" at 268.407,63.094 h1.52
  text "-" at 298.117,63.094 h1.52
  text "2" at -10.1,59.284 h1.52
  text "39,37mil (1,000mm)" at 5.136,59.284 h1.52
  text "PTH" at 34.591,59.284 h1.52
  text "Slot" at 47.44,59.284 h1.52
  text "SIG/PWR1 - SIG/PWR2" at 66.079,59.284 h1.52
  text "Pad" at 96.55,59.284 h1.52
  text "Rounded" at 111.532,59.284 h1.52
  text "(Mixed)" at 130.475,59.284 h1.52
  text "125,98mil (3,200mm)" at 268.407,59.284 h1.52
  text "86,61mil (2,200mm)" at 298.117,59.284 h1.52
  text "2" at -10.1,55.474 h1.52
  text "125,20mil (3,180mm)" at 5.136,55.474 h1.52
  text "PTH" at 34.591,55.474 h1.52
  text "Round" at 47.44,55.474 h1.52
  text "SIG/PWR1 - SIG/PWR2" at 66.079,55.474 h1.52
  text "Pad" at 96.55,55.474 h1.52
  text "Rounded" at 111.532,55.474 h1.52
  text "c635h318_2670034071" at 130.475,55.474 h1.52
  text "-" at 268.407,55.474 h1.52
  text "-" at 298.117,55.474 h1.52
  text "4" at -10.1,51.664 h1.52
  text "25,59mil (0,650mm)" at 5.136,51.664 h1.52
  text "PTH" at 34.591,51.664 h1.52
  text "Round" at 47.44,51.664 h1.52
  text "SIG/PWR1 - SIG/PWR2" at 66.079,51.664 h1.52
  text "Pad" at 96.55,51.664 h1.52
  text "Rounded" at 111.532,51.664 h1.52
  text "c65h65m0mx0_2670034071" at 130.475,51.664 h1.52
  text "-" at 268.407,51.664 h1.52
  text "-" at 298.117,51.664 h1.52
  text "4" at -10.1,47.854 h1.52
  text "27,56mil (0,700mm)" at 5.136,47.854 h1.52
  text "PTH" at 34.591,47.854 h1.52
  text "Slot" at 47.44,47.854 h1.52
  text "SIG/PWR1 - SIG/PWR2" at 66.079,47.854 h1.52
  text "Pad" at 96.55,47.854 h1.52
  text "Rounded" at 111.532,47.854 h1.52
  text "(Mixed)" at 130.475,47.854 h1.52
  text "55,12mil (1,400mm)" at 268.407,47.854 h1.52
  text "27,56mil (0,700mm)" at 298.117,47.854 h1.52
  text "4" at -10.1,44.044 h1.52
  text "27,56mil (0,700mm)" at 5.136,44.044 h1.52
  text "PTH" at 34.591,44.044 h1.52
  text "Slot" at 47.44,44.044 h1.52
  text "SIG/PWR1 - SIG/PWR2" at 66.079,44.044 h1.52
  text "Pad" at 96.55,44.044 h1.52
  text "Rounded" at 111.532,44.044 h1.52
  text "r250_100h70_170r100_2670034071" at 130.475,44.044 h1.52
  text "66,93mil (1,700mm)" at 268.407,44.044 h1.52
  text "39,37mil (1,000mm)" at 298.117,44.044 h1.52
  text "16" at -10.1,40.234 h1.52
  text "27,56mil (0,700mm)" at 5.136,40.234 h1.52
  text "PTH" at 34.591,40.234 h1.52
  text "Round" at 47.44,40.234 h1.52
  text "SIG/PWR1 - SIG/PWR2" at 66.079,40.234 h1.52
  text "Pad" at 96.55,40.234 h1.52
  text "Rounded" at 111.532,40.234 h1.52
  text "c100h70_2670034071" at 130.475,40.234 h1.52
  text "-" at 268.407,40.234 h1.52
  text "-" at 298.117,40.234 h1.52
  text "445" at -10.1,36.424 h1.52
  text "11,81mil (0,300mm)" at 5.136,36.424 h1.52
  text "PTH" at 34.591,36.424 h1.52
  text "Round" at 47.44,36.424 h1.52
  text "SIG/PWR1 - SIG/PWR2" at 66.079,36.424 h1.52
  text "Via" at 96.55,36.424 h1.52
  text "Rounded" at 111.532,36.424 h1.52
  text "(Mixed)" at 130.475,36.424 h1.52
  text "-" at 268.407,36.424 h1.52
  text "-" at 298.117,36.424 h1.52
  text "484 Total" at -10.1,32.614 h1.52
  text "Slot definitions :" at -22.95,28.931 h1.52
  text "Routed Path Length" at 3.281,28.931 h1.52
  text "= Calculated from tool start centre position to tool end centre position." at 31.288,28.931 h1.52
  text "Hole Length" at 3.281,26.392 h1.52
  text "= Routed Path Length + Tool Size = Slot length as defined in the PCB layout" at 20.878,26.392 h1.52

## Text inside footprints (layer, text, board x,y; h text height)
C3: Top Overlay "+" at 124.914,192.738 h1 r270
C61: Top Overlay "+" at 104.803,172.393 h1 r180
D2: Top Overlay "+" at 131.115,112.344 h1 r270
D9: Top Overlay "+" at 193.116,155.677 h1 r270
D10: Top Overlay "+" at 193.091,150.724 h1 r270
D11: Top Overlay "+" at 193.091,153.238 h1 r270